# Altium PCB USBTinyISP-PCB.PcbDoc
Units mm, origin at the board's own origin, x right, y up, seen from the top; angles counter-clockwise.
Board outline 45 x 20 mm, 2 copper layers (Top Layer, Bottom Layer); 28 components, 29 nets, 108 pads, 45 vias.
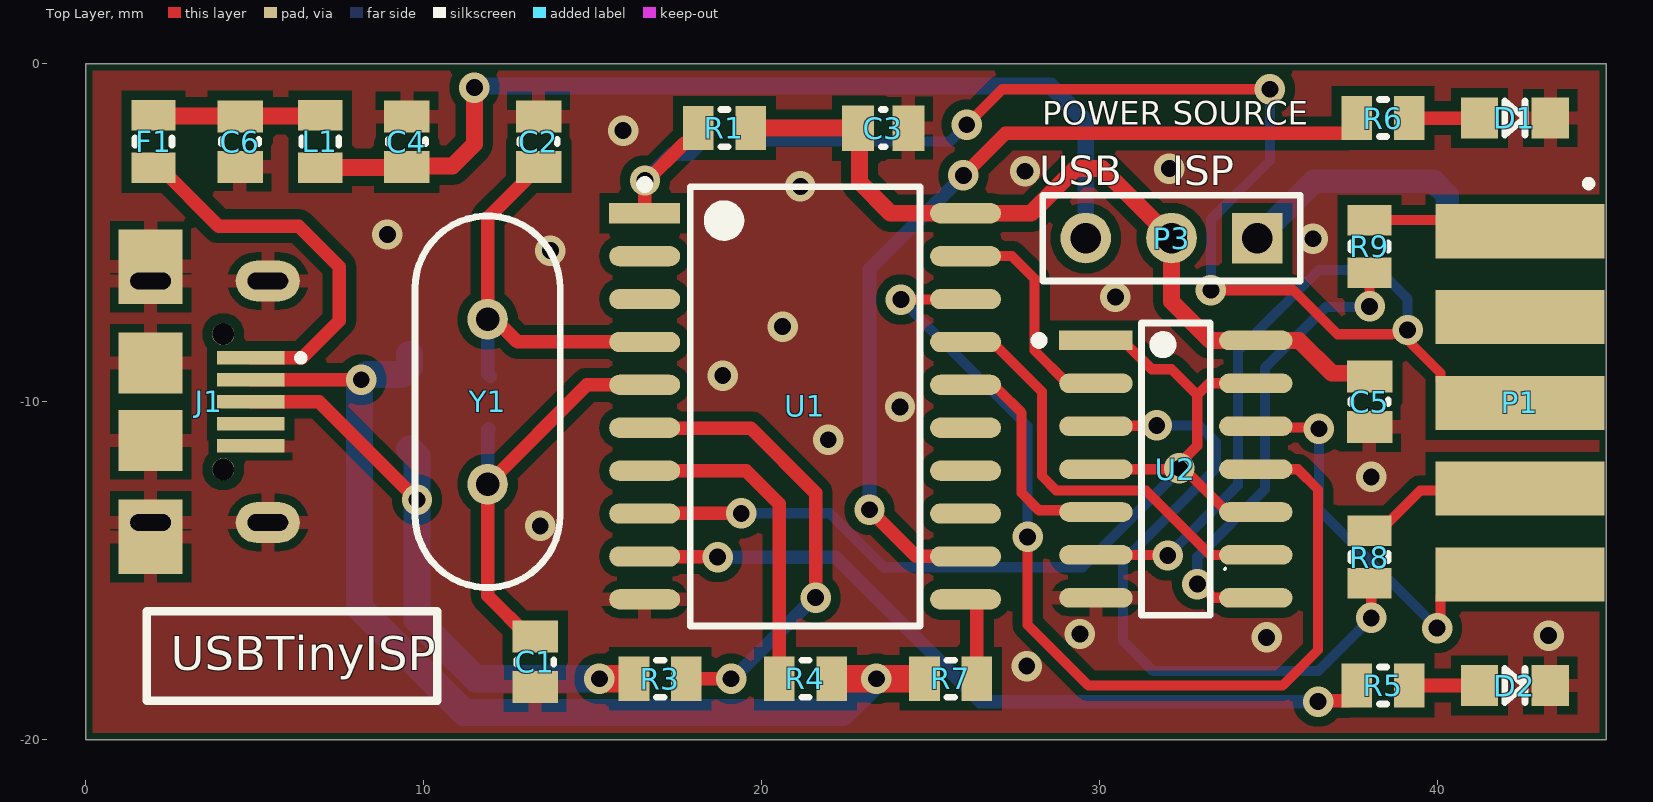
[diagram p0: Top Layer view]
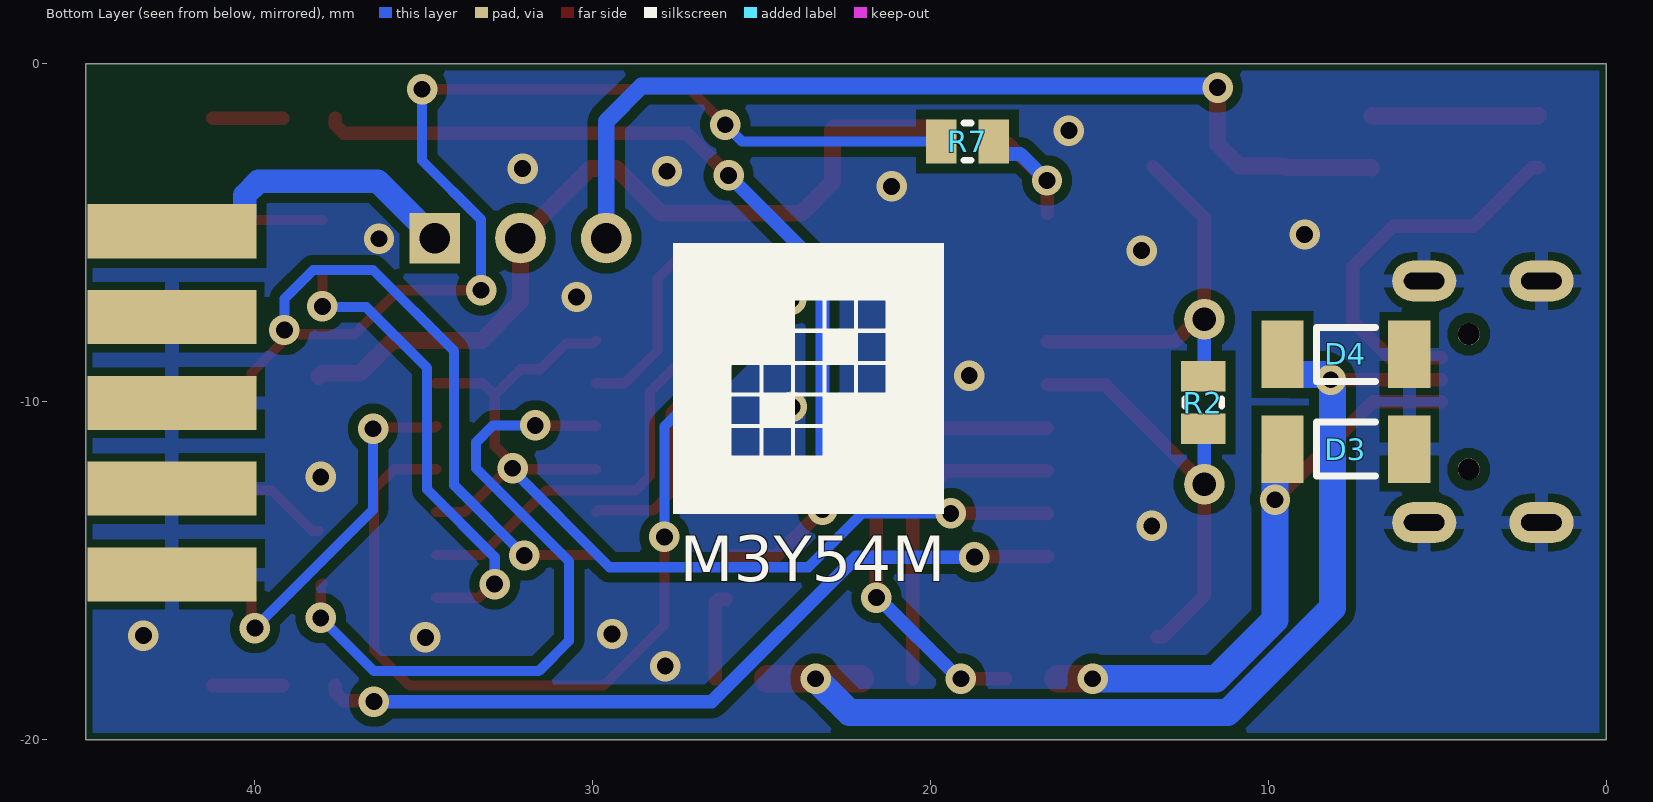
[diagram p1: Bottom Layer view, seen from below]
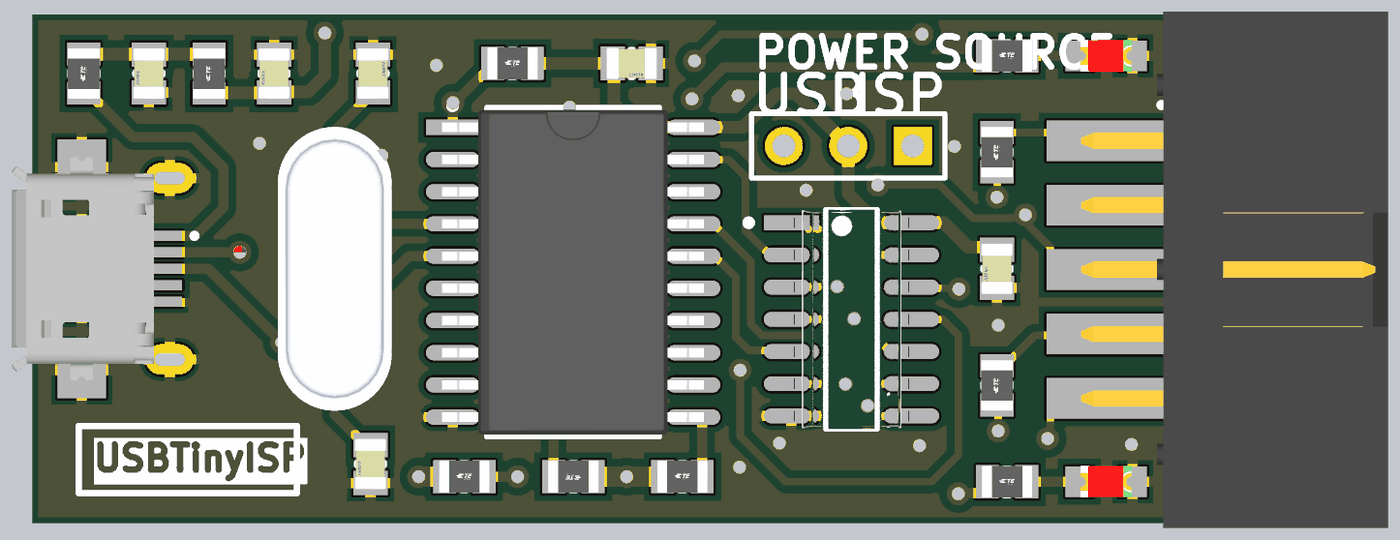
[diagram p2: 3D render of the assembled board from above, using the file's embedded part models]
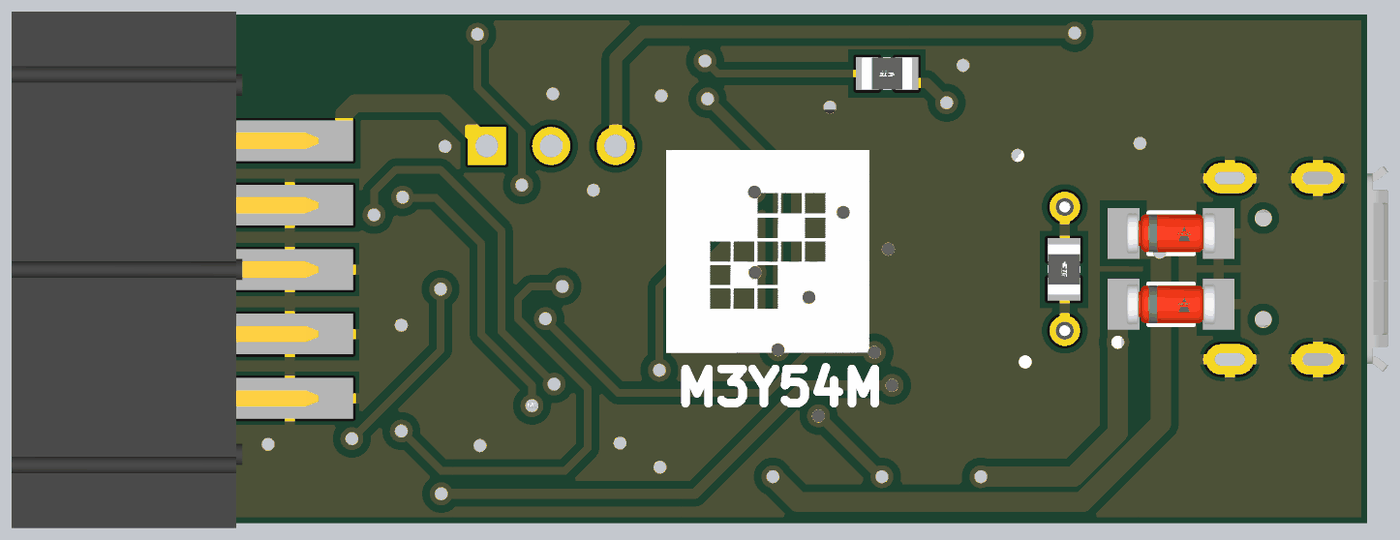
[diagram p3: 3D render of the assembled board from below, using the file's embedded part models]

## Layer stack, top to bottom
Top Solder: solder mask 0.0102, Solder Resist, Dk 3.5
Top Layer: signal copper 0.0356
Dielectric 1: dielectric 0.32, FR-4, Dk 4.8
Bottom Layer: signal copper 0.0356
Bottom Solder: solder mask 0.0102, Solder Resist, Dk 3.5

## Board outline
0,-20 0,0 45,0 45,-20

## Design rules (kind name [scope] priority, off if disabled: settings)
BoardOutlineClearance [All] p1: gap=0.2 ignorepadtopadclearanceinfootprint=FALSE
Clearance Clearance_Polygon_Fiducials [All vs InComponent('FID?')] p1: gap=1.3 ignorepadtopadclearanceinfootprint=FALSE
Clearance Clearance_Polygon [InPolygon] p2: gap=0.3 ignorepadtopadclearanceinfootprint=FALSE
Clearance [All] p3: gap=0.15 ignorepadtopadclearanceinfootprint=FALSE except(0: Arc-Hole Track-Hole SMDPad-Hole THPad-Hole Via-Hole Fill-Hole Poly-Hole Region-Hole Text-Hole)
HoleSize [All] p1: absolutevalues=TRUE maxlimit=3.5 minlimit=0.3 maxpercent=80.000 minpercent=20.000
MinimumSolderMaskSliver [All] p1: minsoldermaskwidth=0.15
PolygonConnect PolygonConnect_Via [IsVia] p1: connectstyle=Direct reliefconductorwidth=0.4 reliefentries=4 polygonreliefangle="90 Angle" airgapwidth=0.25
PolygonConnect [All] p2: connectstyle=Relief reliefconductorwidth=0.4 reliefentries=4 polygonreliefangle="90 Angle" airgapwidth=0.25
RoutingVias [All] p1: holewidth=0.4 width=0.7 viastyle="Through Hole" minholewidth=0.4 minwidth=0.6 maxholewidth=2 maxwidth=3
SilkToSilkClearance [All] p1: silktosilkclearance=0.15
SilkToSolderMaskClearance [IsPad] p1: minsilkscreentomaskgap=0.1 clearancetoexposedcopper=TRUE
SolderMaskExpansion SolderMaskExpansion_Via [IsVia] p1: expansion=0.102 istentingtop=TRUE soldermaskfromhole=TRUE
SolderMaskExpansion [All] p2: expansion=0.102 istentingtop=FALSE
Width [All] p1: maxlimit=2 minlimit=0.25 preferedwidth=0.3
26 further rules are at their usual default settings.

## Components (designator, comment, footprint, x,y, rotation, side; value= is the part's Value field where it differs from the comment)
C1 "Cap" C0805 13.3,-17.7 r90 top value=22pF
C2 "Cap" C0805 13.4,-2.3 r270 top value=22pF
C3 "Cap" C0805 23.6,-1.9 r180 top value=100nF
C4 "Cap" C0805 9.5,-2.3 r90 top value=10uF
C5 "Cap" C0805 38,-10 r90 top value=100nF
C6 "Cap" C0805 4.563,-2.3 r90 top value=10nF
D1 "LED" LED0805 42.3,-1.6 r180 top
D2 "LED" LED0805 42.3,-18.4 r180 top
D3 "Zener 3.6V" SOD-80 7.7,-11.4 r180 bottom
D4 "Zener 3.6V" SOD-80 7.7,-8.6 r180 bottom
F1 "MF-PSMF050X-2" R0805 2,-2.3 r90 top value=500mA_6V_PTC
J1 "629105150921" CON-MICRO-USB-B-SMD-WITH-HOLDER 1.914,-10 r270 top
L1 "Ferrite" R0805 6.937,-2.3 r90 top value=10uH
P1 "61201021621" CON-HDR-EDGE-2X5-1.6MM 44.991,-10.033 r180 top
P3 "Select Power" HDR1X3 34.678,-5.155 r180 top
R1 "Res1" R0805 18.9,-1.9 r0 top value=10K
R2 "Res1" R0805 11.925,-10.025 r270 bottom value=1M
R3 "Res1" R0805 17,-18.2 r0 top value=27
R4 "Res1" R0805 21.3,-18.2 r180 top value=27
R5 "Res1" R0805 38.4,-18.4 r0 top value=1.5K
R6 "Res1" R0805 38.4,-1.6 r0 top value=1.5K
R7 "Res1" R0805 18.9,-2.3 r0 bottom value=DNP
R7 "Res1" R0805 25.6,-18.2 r0 top value=1.5K
R8 "Res1" R0805 38,-14.6 r90 top value=330
R9 "Res1" R0805 38,-5.4 r90 top value=330
U1 "ATtiny2313A-SU" SO20-300MIL 21.289,-10.135 r0 top
U2 "74HC125D" SO14-150MIL 32.265,-11.994 r0 top
Y1 "XTAL" HC-49-US-TH 11.891,-10 r90 top value=12MHz

## Footprints (in the part's own frame and the unit in brackets; to place one, negate y for a bottom-side part, rotate by r counter-clockwise, add the part's x,y. Pads: shape width x height; smd on the part's side, far side on the other; paste and mask are expansions set on the pad)
C0805 [mm] "FP-C0805C-DN-MFG"
  rect 0.95x1.35 smd: 1(-0.75,0) 2(0.75,0)
  silkscreen extent -0.06,-0.55 0.06,0.55, body extent -1,-0.62 1,0.62, height 0.88
CON-HDR-EDGE-2X5-1.6MM [mm] "10 pins, 2X5 edge header for 1.6mm PCB"
  rect 5x1.6 smd: 1(2.54,-5.08) 3(2.54,-2.54) 5(2.54,0) 7(2.54,2.54) 9(2.54,5.08)
  rect 5x1.6 smd far side: 2(2.54,-5.08) 4(2.54,-2.54) 6(2.54,0) 8(2.54,2.54) 10(2.54,5.08)
  silkscreen extent 0.41,-6.59 0.61,-6.39, body extent -8.42,-10.18 3.68,10.18, height 4.43
CON-MICRO-USB-B-SMD-WITH-HOLDER [mm] "MICRO USB 5P female seat B type 7.2 four-pin board foot length 1.3 with column curling"
  rect 0.4x2 smd: 1(-1.3,2.96) 2(-0.65,2.96) 3(0,2.96) 4(0.65,2.96) 5(1.3,2.96)
  rect 2.2x1.9 smd: Shell(-4,0) Shell(4,0)
  oval 1.2x1.9 hole 0.5 slot 1.2 at 90 deg: Shell(-3.575,3.47) Shell(-3.575,0) Shell(3.575,3.47) Shell(3.575,0)
  rect 1.8x1.9 smd: Shell(-1.15,0) Shell(1.15,0)
  round 0.65 hole 0.65 paste+0 mask+0: ""(-2,2.15) ""(2,2.15)
  silkscreen extent -1.4,4.35 -1.2,4.54, body extent -4.4,-2.77 4.4,2.86, height 2.79
HC-49-US-TH [mm] "THD, 2-Leads, Body 11.35x4.65mm, Pitch 4.88mm"
  round 1.2 hole 0.7: 1(-2.44,0) 2(2.44,0)
  silkscreen extent -5.5,-2.15 5.5,2.15, body extent -5.42,-2.25 5.43,2.25, height 3.68
HDR1X3 [mm] "Connector; Header; 3 Position"
  rect 1.5x1.5 hole 0.9: 1(0,0)
  round 1.5 hole 0.9: 2(2.54,0) 3(5.08,0)
  silkscreen extent -1.27,-1.27 6.35,1.27
LED0805 [mm]
  rect 1.1x1.2 smd: 1(1.05,0) 2(-1.05,0)
  silkscreen extent -0.3,-0.5 0.3,0.5, body extent -1.7,-0.77 1.7,0.77, height 0.25
R0805 [mm] "FP-CRG0805-IPC_C"
  rect 0.906x1.307 smd: 1(-0.776,0) 2(0.776,0)
  silkscreen extent -0.11,-0.55 0.11,0.55, body extent -1,-0.62 1,0.62, height 0.65
SO14-150MIL [mm] "SO14; plastic small outline package; 14 leads; body width 3.9 mm"
  rect 2.174x0.582 smd: 1(-2.366,3.81)
  rrect100% 2.174x0.582 smd: 2(-2.366,2.54) 3(-2.366,1.27) 4(-2.366,0) 5(-2.366,-1.27) 6(-2.366,-2.54) 7(-2.366,-3.81) 8(2.366,-3.81) 9(2.366,-2.54) 10(2.366,-1.27) 11(2.366,0) 12(2.366,1.27) 13(2.366,2.54) 14(2.366,3.81)
  silkscreen extent -4.17,-4.33 1.02,4.33, body extent -3.7,-4.57 3.7,4.57, height 0.25
SO20-300MIL [mm] "SOIC, 20-Leads, Body 13x7.6mm, Pitch 1.27mm, IPC Medium Density"
  rect 2.1x0.6 smd: 1(-4.75,5.715)
  oval 2.1x0.6 smd: 2(-4.75,4.445) 3(-4.75,3.175) 4(-4.75,1.905) 5(-4.75,0.635) 6(-4.75,-0.635) 7(-4.75,-1.905) 8(-4.75,-3.175) 9(-4.75,-4.445) 10(-4.75,-5.715) 11(4.75,-5.715) 12(4.75,-4.445) 13(4.75,-3.175) 14(4.75,-1.905) 15(4.75,-0.635) 16(4.75,0.635) 17(4.75,1.905) 18(4.75,3.175) 19(4.75,4.445) 20(4.75,5.715)
  silkscreen extent -4.87,-6.5 3.4,6.69, body extent -5.16,-6.4 5.16,6.4, height 2.52
SOD-80 [mm] "SOD-80 (MiniMELF)"
  rect 1.25x2 smd paste+0 mask+0: 1(1.875,0) 2(-1.875,0)
  silkscreen extent -0.87,-0.8 0.87,0.8, body extent -1.75,-0.8 1.75,0.8, height 1.6

## Part data
C1 C2 C3 C4 C5 C6: "Capacitor", LatestRevisionDate=17-Jul-2002, LatestRevisionNote="Re-released for DXP Platform.", PackageDescription="Radial Cap, Thru-Hole; 2 Leads; 0.3 in Pin Spacing", PackageReference=RAD-0.3, Published=8-Jun-2000, Publisher="Altium Limited"
D1 D2: "Typical LED"
D3 D4: library part DIODE-ZENER, "Zener Diode"
F1: library part FUSE-PTC, "FUSE 500MA SMD (0805) RESETABLE"
J1: library part CON-MICRO-USB-AB-RCPT-SMD, "Micro USB 2.0 Type AB Receptacle WR-COM, Horizontal, SMT", Contact Resistance=30mOhm, Manufacturer="Wurth Elektronik", Operating Temperature=-40to85degC, Rated Current=1.8A, Working Voltage=30VAC, Connector Type=MicroUSB2.0TypeAB, Datasheet URL=https://katalog.we-online.de/em/datasheet/629105150921.pdf, Gender=Receptacle, Manufacturer URL=http://www.we-online.de, Mounting Technology=SMT, Orientation=Horizontal, Package Reference=629105150921, Packaging=TapeandReel, Part Number=629105150921, Publisher=WurthElektronik
L1: library part Inductor, "Inductor", Code_IEC=1005, Code_JEITA=0402, LatestRevisionDate=29-May-2009, LatestRevisionNote="IPC-7351 Footprint Added.", PackageDescription="Chip Inductor", PackageReference=0402-A, Published=8-Jun-2000, Publisher="Altium Limited"
P1: library part BOX-2X5, "WR-BHD Box Header, Male, pitch 2.54mm, THT, Straight, 10p", Contact Resistance=20mOhm, Insulation Resistance=1000MOhm, Manufacturer="Wurth Elektronik", Operating Temperature max.=105C, Operating Temperature min.=-40C, Rated Current=3A, Withstanding Voltage=500V, Working Voltage=250V, ComponentLink1Description="Manufacturer Link", ComponentLink1URL=http://www.we-online.de, ComponentLink2Description=Datasheet, ComponentLink2URL=https://www.we-online.com/catalog/datasheet/61201021621.pdf, Gender=Male, Height=9.1mm, Length=20.36mm, Manufacturer Part Number=61201021621, Mounting Technology=THT, Number of Positions=10, Number of Rows=2, Orientation=Straight, Packaging=Tray, Pitch=2.54mm, Width=9.1mm
P3: library part "Header 3", "Header, 3-Pin", LatestRevisionDate=17-Jul-2002, LatestRevisionNote="Re-released for DXP Platform.", Publisher="Altium Limited"
R1 R2 R3 R4 R5 R6 R7 R7 R8 R9: "Resistor", LatestRevisionDate=17-Jul-2002, LatestRevisionNote="Re-released for DXP Platform.", PackageDescription="Axial Device, Thru-Hole; 2 Leads; 0.3 in Pin Spacing", PackageReference=AXIAL-0.3, Published=8-Jun-2000, Publisher="Altium Limited"
U1: "8-bit AVR Microcontroller, 1.8-5.5V, 20MHz, 2KB Flash, 128 Bytes EEPROM, 128 Bytes SRAM, 20-pin SOIC, Industrial Grade (-40°C to 85°C), Pb-Free", Code_IPC=SOIC127P1030-20, Code_JEDEC=MS-013-AC, ComponentLink1Description="Manufacturer URL", ComponentLink1URL=http://www.atmel.com/, ComponentLink2Description="ATtiny2313A/4313 Datasheet", ComponentLink2URL=http://www.atmel.com/dyn/resources/prod_documents/doc8246.pdf, ComponentLink3Description="ATtiny2313A/4313 Summary", ComponentLink3URL=http://www.atmel.com/dyn/resources/prod_documents/8246S.pdf, DatasheetVersion="revB, Oct-2011", PackageDescription="20-lead, 0.300\" Wide Body, Plastic Gull Wing Small Outline Package (SOIC)", PackageReference=20S, PackageVersion="revB, Nov-2006", RevisionNote="DatasheetVersion & PackageVersion updated. URLs added."
U2: "IC BUFFER NON-INVERT 6V 14SOIC", Case/Package=SOIC, High Level Output Current=-7.8mA, Low Level Output Current=7.8mA, Max Operating Temperature=85°C, Max Supply Voltage=6V, Min Operating Temperature=-40°C, Min Supply Voltage=2V, Operating Supply Voltage=5V, Package Quantity=2500, Quiescent Current=8uA, Contact Plating=Gold, Height=1.58mm, Lead Free="Lead Free", Length=8.65mm, Logic Function=Buffer, Mount="Surface Mount", Number of Bits=4, Number of Bits per Element=1, Number of Channels=4, Number of Circuits=4, Number of Elements=4, Number of Input Lines=4, Number of Inputs=4, Number of Output Lines=4, Number of Outputs=4, Number of Pins=14, Output Current=7.8mA, Output Type=3-STATE, Packaging="Tape and Reel", Polarity=Non-Inverting, Propagation Delay=190ns, Radiation Hardening=No, REACH SVHC="No SVHC", RoHS Compliant=Yes, Series=74HC, Technology=CMOS, Turn-On Delay Time=150ns, Width=3.91mm
Y1: "Crystal Oscillator", Designer="Meysam Parvizi", Email=meysam.parvizi.ir@gmail.com, Weblog=http://mp.tabin.ir

## Via types
v1: diameter 0.9, hole 0.5, Top Layer to Bottom Layer, tented both sides, 45 vias

## Nets (pads, with @x,y where several pads share a name; then routed paths per layer and width w, separated by ;. In a path a pad name is that pad's centre, name@x,y a point inside that pad or via, vN(x,y) a via of type N, cw(c..) or ccw(c..) an arc to the next point about the centre after c; other vN are vias at no path point)
CONTROL: U1.8 U2.1 U2.4 U2.10 U2.13 | length 30.9
  Top Layer w0.3: U2.4 29.902,-11.997 32.397,-11.997 32.4,-12 32.522,-12 33.786,-13.264 U2.10 ; U2.1 29.99,-8.275 30.786,-8.275 31.548,-9.038 32.138,-9.038 32.9,-9.8 ; v1(32.37,-11.97) 32.37,-11.834 32.9,-11.304 32.9,-9.8 ; U2.13 33.246,-9.454 32.9,-9.8
  Top Layer w0.4: U1.8 16.543,-13.306 19.394,-13.306 v1(19.397,-13.302)
  Bottom Layer w0.3: v1(19.397,-13.302) 22.018,-13.302 23.615,-14.9 29.5,-14.9 32.37,-12.03 v1(32.37,-11.97)
GND: C1.1 C2.1 C3.1 C4.2 C5.1 C6.1 D1.2 D2.2 D3.1 D4.1 J1.5 J1.Shell P1.4 P1.6 P1.8 P1.10 U1.10 U2.7
  other v1: 27.85,-17.825 34.95,-16.975 43.3,-16.925 29.425,-16.875 13.45,-13.675 38.05,-12.225 21.975,-11.125 24.1,-10.15 18.85,-9.225 20.625,-7.775 30.475,-6.9 13.75,-5.525 36.325,-5.175 8.925,-5.05 21.15,-3.625 27.8,-3.175 32.075,-3.1 15.9,-1.975
ISP_VCC: P1.2 P3.1 | length 9.4
  Bottom Layer w0.7: P3.1 36.358,-3.475 39.891,-3.475 40.301,-3.885 40.301,-4.503 40.751,-4.953 P1.2
MISO: P1.9 U2.12 | length 12.8
  Top Layer w0.3: U2.12 34.669,-10.762 36.462,-10.762 v1(36.5,-10.8) ; v1(40,-16.7) 40.101,-16.599 40.101,-15.763 40.751,-15.113 P1.9
  Bottom Layer w0.3: v1(36.5,-10.8) 36.5,-13.2 v1(40,-16.7)
MISO2: U1.18 U2.11 | length 29.7
  Top Layer w0.3: v1(24.125,-6.975) 24.132,-6.968 26.032,-6.968 U1.18 ; v1(27.875,-14) 27.875,-16.6 29.675,-18.4 35.425,-18.4 36.475,-17.35 36.475,-12.6 35.872,-11.997 34.634,-11.997 U2.11
  Bottom Layer w0.3: v1(24.125,-6.975) 27.875,-10.725 v1(27.875,-14)
MOSI: P1.1 R9.2 | length 4.6
  Top Layer w0.3: R9.2 42.122,-4.624 P1.1
MOSI2: U1.17 U2.9 | length 12.7
  Top Layer w0.3: U1.17 26.83,-8.23 28.3,-9.7 28.3,-12.2 28.725,-12.625 31.375,-12.625 33.284,-14.534 U2.9
NetC4_1: C4.1 L1.1 P3.3 | length 28.5
  Top Layer w0.5: L1.1 6.95,-3.063 9.487,-3.063 C4.1 9.525,-3.025 10.85,-3.025 11.5,-2.375 v1(11.5,-0.7)
  Bottom Layer w0.5: v1(11.5,-0.7) 11.55,-0.65 28.55,-0.65 29.598,-1.698 P3.3
NetC6_2: C6.2 F1.2 L1.2 | length 5
  Top Layer w0.5: F1.2 2.013,-1.537 4.55,-1.537 C6.2 4.576,-1.537 6.924,-1.537 L1.2
NetD1_1: D1.1 R6.2 | length 2.1
  Top Layer w0.4: R6.2 D1.1
NetD2_1: D2.1 R5.2 | length 2.1
  Top Layer w0.4: R5.2 D2.1
NetF1_1: F1.1 J1.1 | length 11.4
  Top Layer w0.4: F1.1 2.201,-3.076 3.924,-4.8 6.3,-4.8 7.5,-6 7.5,-7.6 6.4,-8.7 J1.1
NetR3_2: R3.2 U1.6 | length 13.8
  Top Layer w0.4: U1.6 16.554,-10.785 19.685,-10.785 21.6,-12.7 v1(21.6,-15.8) ; R3.2 v1(19.1,-18.2)
  Bottom Layer w0.4: v1(19.1,-18.2) 19.15,-18.2 21.55,-15.8 v1(21.6,-15.8)
NetR4_2: R4.2 U1.7 | length 9.6
  Top Layer w0.4: U1.7 19.54,-12.04 20.524,-13.024 R4.2
NetR5_1: R5.1 U1.9 | length 23.2
  Top Layer w0.4: U1.9 16.549,-14.59 18.69,-14.59 v1(18.7,-14.6) ; v1(36.475,-18.875) 36.496,-18.854 37.371,-18.854 37.624,-18.6 R5.1
  Bottom Layer w0.4: v1(18.7,-14.6) 22.2,-14.6 26.475,-18.875 v1(36.475,-18.875)
NetR6_1: R6.1 U1.12 | length 26.9
  Top Layer w0.4: v1(23.196,-13.196) 24.58,-14.58 U1.12 ; v1(25.975,-3.3) 27.221,-2.054 37.371,-2.054 37.624,-1.8 R6.1
  Bottom Layer w0.4: v1(23.196,-13.196) 23.196,-6.079 v1(25.975,-3.3)
NetR8_1: R8.1 U2.3 | length 20.2
  Top Layer w0.3: U2.3 29.911,-10.712 31.688,-10.712 v1(31.7,-10.7) ; R8.1 38.05,-15.426 v1(38.05,-16.4)
  Bottom Layer w0.3: v1(31.7,-10.7) 32.95,-10.7 33.45,-11.2 33.45,-11.975 30.7,-14.725 30.7,-17.075 31.6,-17.975 36.475,-17.975 v1(38.05,-16.4)
NetR9_1: R9.1 U2.8 | length 13.9
  Top Layer w0.3: v1(32.9,-15.4) 32.972,-15.4 33.376,-15.804 U2.8 ; v1(38,-7.175) R9.1@38,-6.276
  Bottom Layer w0.3: v1(32.9,-15.4) 32.9,-14.6 34.9,-12.6 34.9,-9 36.7,-7.2 37.975,-7.2 v1(38,-7.175)
PD6: R7.2@26.376,-18.2 U1.11 | length 2.6
  Top Layer w0.4: U1.11 26.284,-15.85 26.376,-15.942 R7.2@26.376,-18.2
RESET: R1.1 R7.1@18.124,-2.3 U1.1 | length 5.4
  Top Layer w0.4: U1.1 16.539,-3.52 17.705,-2.354 17.871,-2.354 18.124,-2.1 R1.1
  Bottom Layer w0.4: v1(16.55,-3.45) 17.334,-2.666 17.871,-2.666 18.124,-2.413 R7.1@18.124,-2.3
RST: P1.5 R7.2@19.676,-2.3 U2.6 | length 50
  Top Layer w0.3: v1(26.075,-1.8) 27.125,-0.75 v1(35.05,-0.75) ; U2.6 29.907,-14.542 32.017,-14.542 v1(32.025,-14.55) ; v1(33.3,-6.7) 35.75,-6.7 37.05,-8 38.649,-8 38.659,-7.99 39.01,-7.99 v1(39.125,-7.875) 39.24,-7.99 39.24,-8.29 40.101,-9.151 40.101,-9.383 40.751,-10.033 P1.5
  Bottom Layer w0.3: R7.2@19.676,-2.3 25.575,-2.3 v1(26.075,-1.8) ; v1(32.025,-14.55) 34.1,-12.475 34.1,-8.5 36.5,-6.1 38.275,-6.1 39.125,-6.95 v1(39.125,-7.875) ; v1(33.3,-6.7) 33.3,-4.609 35.05,-2.859 v1(35.05,-0.75)
RST2: U1.16 U2.5 | length 6.8
  Top Layer w0.3: U1.16 26.87,-9.5 27.02,-9.65 27.7,-10.33 27.7,-12.7 28.21,-13.21 29.845,-13.21 U2.5
SCK: P1.7 R8.2 | length 4.9
  Top Layer w0.3: R8.2@38.1,-13.824 38.301,-13.824 39.494,-12.631 42.393,-12.631 P1.7
SCK2: U1.19 U2.2 | length 6.7
  Top Layer w0.3: U1.19 27.415,-5.69 28.083,-6.358 28.083,-8.483 29.054,-9.454 U2.2
USB_DM: D4.2 J1.2 R4.1 R7.1@24.824,-18.2 | length 31.7
  Top Layer w0.4: J1.2 v1(8.15,-9.35)
  Top Layer w0.8: R4.1 R7.1@24.824,-18.2
  Bottom Layer w0.8: D4.2 9.575,-8.975 9.35,-9.2 8.327,-9.2 8.177,-9.35 v1(8.15,-9.35) 8.15,-9.377 8.1,-9.427 8.1,-16.1 11.2,-19.2 22.4,-19.2 v1(23.4,-18.2)
USB_DP: D3.2 J1.3 R3.1 | length 18.4
  Top Layer w0.4: J1.3 6.9,-10 v1(9.8,-12.9)
  Top Layer w0.8: v1(15.2,-18.2) R3.1
  Bottom Layer w0.8: D3.2 9.8,-11.625 v1(9.8,-12.9) 9.8,-16.456 11.544,-18.2 v1(15.2,-18.2)
VCC: C3.2 C5.2 P3.2 R1.2 U1.20 U2.14 | length 24.6
  Top Layer w0.5: R1.2 C3.2 22.9,-1.95 22.9,-3.5 23.82,-4.42 27.98,-4.42 29.3,-3.1 30.083,-3.1 P3.2 32.138,-7.038 33.284,-8.184 35.909,-8.184 36.882,-9.157 38.007,-9.157 C5.2@38.1,-9.25
XTAL1: C1.2 R2.2 U1.5 Y1.1 | length 12.7
  Top Layer w0.4: C1.2 13.1,-16.95 11.891,-15.741 Y1.1 14.831,-9.5 U1.5
  Bottom Layer w0.4: Y1.1 11.891,-10.835 R2.2
XTAL2: C2.2 R2.1 U1.4 Y1.2 | length 11.8
  Top Layer w0.4: C2.2 11.891,-4.559 Y1.2 12.107,-7.56 12.777,-8.23 U1.4
  Bottom Layer w0.4: Y1.2 11.891,-9.165 R2.1@11.975,-9.249
pads on no net: J1. J1.4 P1.3 U1.2 U1.3 U1.13 U1.14 U1.15

## Polygon pours and split planes (outlines as drawn)
GND on Top Layer "GND_L01_P001" (solid, remove dead copper, pour order 1): 0,-20 0,0 45,0 45,-20
GND on Bottom Layer "GND_L02_P000" (solid, remove dead copper, pour order 0): 0,-20 0,0 45,0 45,-20

## Silkscreen, mask and mechanical layers (free items; w line width, h text height)
Top Overlay:
  lines w0.1: 33.708,-14.956 33.735,-14.929
  lines w0.25: 1.8,-18.85 1.8,-16.2 10.4,-16.2 10.4,-18.85 1.8,-18.85
  text "POWER SOURCE" at 28.308,-2.04 h1.2
  text "USB" at 28.228,-3.885 h1.5
  text "ISP" at 32.165,-3.885 h1.5
  text "USBTinyISP" at 2.514,-17.942 h1
Bottom Overlay:
  region: 603 vertices and 15 holes, not listed, extent 19.6,-13.319 27.612,-5.308
  text "M3Y54M" at 27.425,-15.321 h1.35
Mechanical 1:
  the board outline again, w0.2